# EAGLE board main_board_rv1 (EAGLE 9.6.2)

Size 160 x 100 mm. Coordinates in mm from the lower left corner, seen from the top.
Outline: 0,0 160,0 160,100 0,100 0,0
Copper layers (1*16): Top 0.035mm / dielectric 1.5mm / Bottom 0.035mm
Design rules "default": minimum track width 6mil, minimum drill 0.35mm, track to track 6mil, track to pad 6mil, pad to pad 6mil, via to via 6mil, smd to smd 6mil, copper to edge 40mil, drill to drill 6mil, minimum pad ring 10mil, minimum via ring 8mil, stop-mask expansion 4mil, vias tented up to drill 0mil, thermal gap 10mil

## Footprints (pad centres in the part's own frame; a part is rotated, then mirrored left to right if it is on the bottom)
C2.5-2 = drill 0.813 pad 1.6 octagon: 1 -1.27,0; 2 1.27,0
SO20W = smd 0.66 x 2.032: 1 -5.715,-5.029; 2 -4.445,-5.029; 3 -3.175,-5.029; 4 -1.905,-5.029; 5 -0.635,-5.029; 6 0.635,-5.029; 7 1.905,-5.029; 8 3.175,-5.029; 9 4.445,-5.029; 10 5.715,-5.029; 11 5.715,5.029; 12 4.445,5.029; 13 3.175,5.029; 14 1.905,5.029; 15 0.635,5.029; 16 -0.635,5.029; 17 -1.905,5.029; 18 -3.175,5.029; 19 -4.445,5.029; 20 -5.715,5.029
R0603 = smd 1 x 1.1: 1 -0.85,0; 2 0.85,0
MICROCHIP_PIC18F46K20-I-P_0 = drill 0.9 pad 1.5 square: 1 -7.62,24.13 | drill 0.9 pad 1.5: 2 -7.62,21.59; 3 -7.62,19.05; 4 -7.62,16.51; 5 -7.62,13.97; 6 -7.62,11.43; 7 -7.62,8.89; 8 -7.62,6.35; 9 -7.62,3.81; 10 -7.62,1.27; 11 -7.62,-1.27; 12 -7.62,-3.81; 13 -7.62,-6.35; 14 -7.62,-8.89; 15 -7.62,-11.43; 16 -7.62,-13.97; 17 -7.62,-16.51; 18 -7.62,-19.05; 19 -7.62,-21.59; 20 -7.62,-24.13; 21 7.62,-24.13; 22 7.62,-21.59; 23 7.62,-19.05; 24 7.62,-16.51; 25 7.62,-13.97; 26 7.62,-11.43; 27 7.62,-8.89; 28 7.62,-6.35; 29 7.62,-3.81; 30 7.62,-1.27; 31 7.62,1.27; 32 7.62,3.81; 33 7.62,6.35; 34 7.62,8.89; 35 7.62,11.43; 36 7.62,13.97; 37 7.62,16.51; 38 7.62,19.05; 39 7.62,21.59; 40 7.62,24.13
FH21-16S-1DS = drill 0.813: 1 -7.5,0; 2 -6.5,2; 3 -5.5,0; 4 -4.5,2; 5 -3.5,0; 6 -2.5,2; 7 -1.5,0; 8 -0.5,2; 9 0.5,0; 10 1.5,2; 11 2.5,0; 12 3.5,2; 13 4.5,0; 14 5.5,2; 15 6.5,0; 16 7.5,2
22-23-2041 = drill 1 long: 1 -3.81,0; 2 -1.27,0; 3 1.27,0; 4 3.81,0
FH21-8S-1DSA = drill 0.813: 1 -3.5,-1; 2 -2.5,1; 3 -1.5,-1; 4 -0.5,1; 5 0.5,-1; 6 1.5,1; 7 2.5,-1; 8 3.5,1
22-23-2021 = drill 1 long: 1 -1.27,0; 2 1.27,0

## Placement (x,y rotation side)
C11  0.1uF  [C2.5-2]  24.13,41.91 90 top
C12  1 uF  [C2.5-2]  11.43,41.91 270 top
IC1  74C922M  [SO20W]  19.05,55.88 0 top
IC2  74C922M  [SO20W]  39.37,54.61 0 top
R1  1k  [R0603]  106.68,54.61 90 top
U2  MICROCHIP_PIC18F46K20-I-PMICROCHIP_PIC18F46K20-I-P_0_0  [MICROCHIP_PIC18F46K20-I-P_0]  105.41,31.75 0 top
X_DISP  FH21-16S-1DS  [FH21-16S-1DS]  153.67,22.86 90 top
X_HX711  22-23-2041  [22-23-2041]  49.53,13.97 0 top
X_KP1  FH21-8S-1DSA  [FH21-8S-1DSA]  17.78,83.82 180 top
X_KP2  FH21-8S-1DSA  [FH21-8S-1DSA]  26.67,83.82 180 top
X_POWER  22-23-2021  [22-23-2021]  3.81,5.08 0 top

## Library data of the parts
C11 C12 = capacitor-wima
IC1 IC2 = 74xx-eu_ff
R1 = rcl; SPICEPREFIX: R
U2 = P; CIIVA_IDS: 1156701; DATASHEET_VERSION: revF, Sep-2009; FOOTPRINT_VARIANT_NAME_0: Manufacturer Recommended; IMPORTED: yes; IMPORTED_FROM: vault; IMPORT_TS: 1521846864; MF: Microchip; MPN: PIC18F46K20-I/P; PACKAGE: PDIP600-P40; PACKAGE_DESCRIPTION: 40-Lead Plastic Dual In-Line (P) - 600 mil Body [PDIP]; PACKAGE_VERSION: revBB, Aug-2009; PREFIX: U; RELEASE_DATE: 1300262623; VAULT_GUID: 62ADF5D1-6D2B-4FDE-90F0-0F8BF26695C1; VAULT_REVISION: 3C46FF8B-A334-4966-A067-8205D2A13521
X_DISP X_KP1 X_KP2 = con-hirose; OC_FARNELL: unknown; OC_NEWARK: unknown
X_HX711 = con-molex; MF: MOLEX; MPN: 22-23-2041; OC_FARNELL: 1462920; OC_NEWARK: 38C0355
X_POWER = con-molex; MF: MOLEX; MPN: 22-23-2021; OC_FARNELL: 1462926; OC_NEWARK: 25C3832

## Nets
+5V: IC1.20 IC2.20 U2.11 U2.32 X_DISP.2 X_HX711.1 X_POWER.2
CNTRST: U2.16 X_DISP.3
D4: U2.27 X_DISP.11
D5: U2.28 X_DISP.12
D6: U2.29 X_DISP.13
D7: U2.30 X_DISP.14
E: U2.21 X_DISP.6
GND: C11.2 C12.2 IC1.10 IC1.14 IC2.10 IC2.14 R1.1 U2.12 U2.31 X_DISP.1 X_DISP.5 X_DISP.7 X_DISP.8 X_DISP.9 X_DISP.10 X_HX711.4 X_POWER.1
N$1: U2.26 X_HX711.3
N$2: IC2.12 X_KP2.1
N$3: IC2.9 X_KP2.2
N$4: IC2.8 X_KP2.3
N$5: IC2.11 X_KP2.4
N$6: IC2.1 X_KP2.5
N$7: IC2.2 X_KP2.6
N$8: IC2.3 X_KP2.7
N$9: IC2.4 X_KP2.8
N$10: IC1.12 X_KP1.1
N$11: IC1.16 U2.36
N$12: IC1.9 X_KP1.2
N$13: IC1.8 X_KP1.3
N$14: IC1.11 X_KP1.4
N$15: U2.25 X_HX711.2
N$16: IC1.17 U2.35
N$17: IC1.18 U2.34
N$18: IC1.19 U2.33
N$19: IC2.19 U2.37
N$20: IC2.18 U2.38
N$21: IC2.17 U2.39
N$22: IC2.16 U2.40
N$23: IC1.1 X_KP1.5
N$24: IC1.2 X_KP1.6
N$25: IC1.3 X_KP1.7
N$26: IC1.4 X_KP1.8
N$27: R1.2 U2.1
N$28: C11.1 IC1.6 IC2.6
N$29: C12.1 IC1.7 IC2.7
N$45: IC1.13 U2.2
N$60: IC2.13 U2.3
NC: X_DISP.15 X_DISP.16
RS: U2.22 X_DISP.4

## Tracks (layer width: path | path; a pad name or v marks a point on that pad's centre or on a via)
+5V  (6 unrouted)
CNTRST  (1 unrouted)
D4  (1 unrouted)
D5  (1 unrouted)
D6  (1 unrouted)
D7  (1 unrouted)
E  (1 unrouted)
GND  (16 unrouted)
N$1  (1 unrouted)
N$2  (1 unrouted)
N$3  (1 unrouted)
N$4  (1 unrouted)
N$5  (1 unrouted)
N$6  (1 unrouted)
N$7  (1 unrouted)
N$8  (1 unrouted)
N$9  (1 unrouted)
N$10  (1 unrouted)
N$11  (1 unrouted)
N$12  (1 unrouted)
N$13  (1 unrouted)
N$14  (1 unrouted)
N$15  (1 unrouted)
N$16  (1 unrouted)
N$17  (1 unrouted)
N$18  (1 unrouted)
N$19  (1 unrouted)
N$20  (1 unrouted)
N$21  (1 unrouted)
N$22  (1 unrouted)
N$23  (1 unrouted)
N$24  (1 unrouted)
N$25  (1 unrouted)
N$26  (1 unrouted)
N$27  (1 unrouted)
N$28  (2 unrouted)
N$29  (2 unrouted)
N$45  (1 unrouted)
N$60  (1 unrouted)
NC  (1 unrouted)
RS  (1 unrouted)